# EAGLE board wear_fixture_board_mill_single_layer (EAGLE 9.1.3)
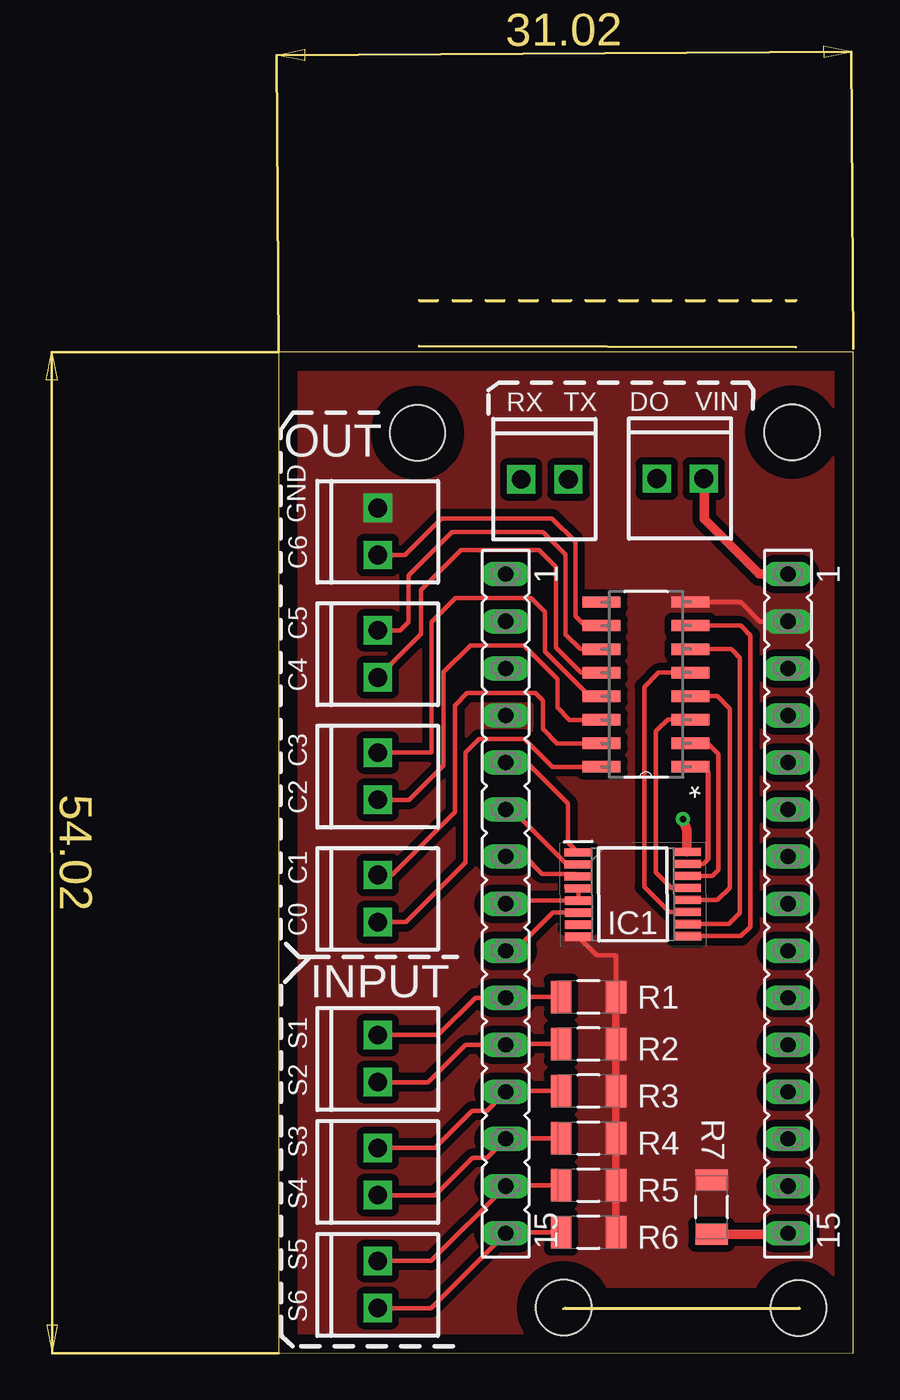
[diagram p0: board, top side]
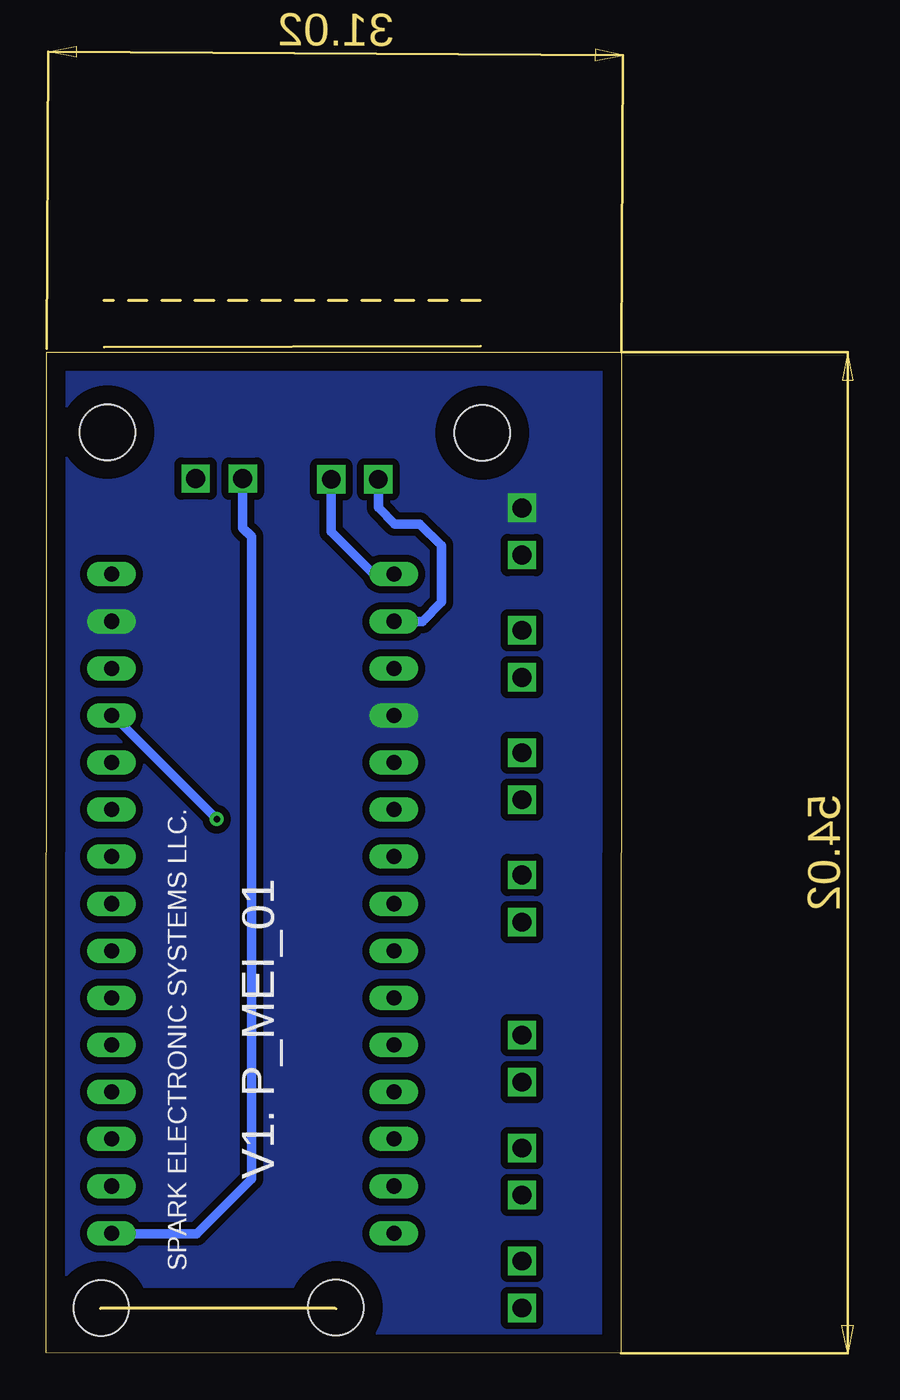
[diagram p1: board, bottom side, seen from below]

Size 31.03 x 56.81 mm. Coordinates in mm from the lower left corner, seen from the top.
Outline: 15.47,2.43 28.1,2.43 28.12,2.4
Outline: 7.6,56.81 27.93,56.81
Outline: 0.01,0 31.03,0.01 31.02,54.03 0,54.02 0.01,0
Copper layers (1*16): Top 0.035mm / dielectric 1.5mm / Bottom 0.035mm
Design rules "default": minimum track width 6mil, minimum drill 0.35mm, track to track 6mil, track to pad 6mil, pad to pad 6mil, via to via 6mil, smd to smd 6mil, copper to edge 40mil, drill to drill 6mil, minimum pad ring 10mil, minimum via ring 8mil, stop-mask expansion 4mil, vias tented up to drill 0mil, thermal gap 10mil
Holes 3 mm at 7.51,49.67 27.73,49.7 15.39,2.45 28.07,2.43

## Footprints (pad centres in the part's own frame; a part is rotated, then mirrored left to right if it is on the bottom)
SOP65P640X120-16N = smd 1.475 x 0.45: 1 -2.938,2.275; 2 -2.938,1.625; 3 -2.938,0.975; 4 -2.938,0.325; 5 -2.938,-0.325; 6 -2.938,-0.975; 7 -2.938,-1.625; 8 -2.938,-2.275; 9 2.938,-2.275; 10 2.938,-1.625; 11 2.938,-0.975; 12 2.938,-0.325; 13 2.938,0.325; 14 2.938,0.975; 15 2.938,1.625; 16 2.938,2.275
1X02_2.54_SCREWTERM = drill 1.016 square: P1 2.54,0; P2 0,0
RESC3216X71N = smd 1.118 x 1.753: 1 -1.473,0; 2 1.473,0
FE15 = drill 0.813 long: 1 -17.78,0; 2 -15.24,0; 3 -12.7,0; 4 -10.16,0; 5 -7.62,0; 6 -5.08,0; 7 -2.54,0; 8 0,0; 9 2.54,0; 10 5.08,0; 11 7.62,0; 12 10.16,0; 13 12.7,0; 14 15.24,0; 15 17.78,0
SOIC127P600X175-16N = smd 2.057 x 0.61: 1 -4.801,8.89; 2 -4.801,7.62; 3 -4.801,6.35; 4 -4.801,5.08; 5 -4.801,3.81; 6 -4.801,2.54; 7 -4.801,1.27; 8 -4.801,0; 9 0,0; 10 0,1.27; 11 0,2.54; 12 0,3.81; 13 0,5.08; 14 0,6.35; 15 0,7.62; 16 0,8.89

## Placement (x,y rotation side)
IC1  74VHC238FT  [SOP65P640X120-16N]  19.13,24.76 0.3 top
J1  [1X02_2.54_SCREWTERM]  5.36,14.62 90 top
J2  [1X02_2.54_SCREWTERM]  5.36,8.53 90 top
J3  [1X02_2.54_SCREWTERM]  5.36,2.43 90 top
J4  [1X02_2.54_SCREWTERM]  5.36,23.26 90 top
J5  [1X02_2.54_SCREWTERM]  5.36,29.86 90 top
J6  [1X02_2.54_SCREWTERM]  5.36,36.47 90 top
J7  [1X02_2.54_SCREWTERM]  20.43,47.2 0 top
J8  [1X02_2.54_SCREWTERM]  5.36,43.07 90 top
J9  [1X02_2.54_SCREWTERM]  13.11,47.16 0 top
R1  [RESC3216X71N]  16.74,19.22 0 top
R2  [RESC3216X71N]  16.74,16.68 0 top
R3  [RESC3216X71N]  16.74,14.14 0 top
R4  [RESC3216X71N]  16.74,11.6 0 top
R5  [RESC3216X71N]  16.74,9.06 0 top
R6  [RESC3216X71N]  16.74,6.52 0 top
R7  [RESC3216X71N]  23.38,7.88 270 top
SV1  [FE15]  27.51,24.25 270 top
SV2  [FE15]  12.27,24.25 270 top
U1  ULN2003ADR  [SOIC127P600X175-16N]  17.45,40.53 180 top

## Library data of the parts
IC1 = SamacSys_Parts; DESCRIPTION: Encoders, Decoders, Multiplexers & Demultiplexers CMOS Logic IC 5.5ns 8mA 2.0V-5.5V; HEIGHT: 1.2mm; MANUFACTURER_NAME: Toshiba; MANUFACTURER_PART_NUMBER: 74VHC238FT; MOUSER_PART_NUMBER: 757-74VHC238FT; MOUSER_PRICE-STOCK: https://www.mouser.co.uk/ProductDetail/Toshiba/74VHC238FT?qs=byeeYqUIh0Pl5hUxTthlPw%3D%3D
J1-J9 = SparkFun-Connectors
R1-R7 = Vishay_By_element14_Batch_1; MPN: CRCW12061K00FKEA; OC_FARNELL: 1469965; OC_NEWARK: 53K1780; SUPPLIER: Vishay; TOLERANCE: ±1%; WATTAGE: 0.25W
SV1 SV2 = con-lsta; OC_FARNELL: unknown; OC_NEWARK: unknown
U1 = Texas Instruments_By_element14_Batch_1; MPN: ULN2003ADR; OC_FARNELL: 1470513; OC_NEWARK: 77C3560; PACKAGE: SOIC-16; SUPPLIER: TEXAS INSTRUMENTS

## Nets
DEWE_: J7.P2 R7.2 SV1.15
EN: IC1.4 IC1.5 SV2.8
GND: IC1.8 J8.P1 R1.2 R2.2 R3.2 R4.2 R5.2 R6.2 R7.1 SV1.2 SV2.4 U1.8
IN_0: IC1.6 SV2.9
OUT1: J4.P2 U1.16
OUT2: J4.P1 U1.15
OUT3: J5.P2 U1.14
OUT4: J5.P1 U1.13
OUT5: J6.P2 U1.12
OUT6: J6.P1 U1.11
OUT7: J8.P2 U1.10
RX: J9.P2 SV2.2
SEL_A: IC1.1 SV2.5
SEL_B: IC1.2 SV2.6
SEL_C: IC1.3 SV2.7
SNS1: J1.P1 R1.1 SV2.10
SNS2: J1.P2 R2.1 SV2.11
SNS3: J2.P1 R3.1 SV2.12
SNS4: J2.P2 R4.1 SV2.13
SNS5: J3.P1 R5.1 SV2.14
SNS6: J3.P2 R6.1 SV2.15
TX: J9.P1 SV2.1
VCC: IC1.16 SV1.4
VIN: J7.P1 SV1.1
Y0: IC1.15 U1.1
Y1: IC1.14 U1.2
Y2: IC1.13 U1.3
Y3: IC1.12 U1.4
Y4: IC1.11 U1.5
Y5: IC1.10 U1.6
Y6: IC1.9 U1.7

## Tracks (layer width: path | path; a pad name or v marks a point on that pad's centre or on a via)
DEWE_
  Top 0.508: R7.2 27.45,6.41 SV1.15
  Bottom 0.508: SV1.15 26.32,6.47 26.29,6.44 22.92,6.44 19.95,9.41 19.95,44.06 20.43,44.54 J7.P2
EN
  Top 0.254: SV2.8 12.44,24.42 IC1.5 IC1.4
GND
  Top 0.152: 21.74,40.53 U1.8
  Top 0.254: IC1.8 17.2,21.48 18.22,21.48 R1.2 | SV1.2 26,39.49 24.96,40.53 U1.8
  Top 0.406: R6.2 R5.2 R4.2 R3.2 R2.2 R1.2 18.52,19.22
  pour Top (isolate 0.381, no thermals): 0.01,53.98 30.7,53.98 30.7,0 0.01,0
  pour Bottom (isolate 0.381, no thermals): 0.01,54.07 31.04,54.07 31.04,-0.22 0.01,-0.22
IN_0
  Top 0.254: IC1.6 14.81,23.77 12.75,21.71 SV2.9
OUT1
  Top 0.254: U1.16 14.79,31.64 13.29,33.14 10.84,33.14 10.1,32.41 10.1,26.48 6.89,23.26 J4.P2
OUT2
  Top 0.254: J4.P1 6.13,25.8 9.53,29.2 9.53,34.96 10.19,35.62 13.88,35.62 14.28,35.22 14.28,33.68 15.05,32.91 U1.15
OUT3
  Top 0.254: U1.14 15.72,34.18 15.06,34.84 15.06,36.38 13.26,38.19 10.36,38.19 8.91,36.74 8.91,31.72 7.05,29.86 J5.P2
OUT4
  Top 0.152: U1.13 17.42,35.48
  Top 0.254: J5.P1 8.23,32.4 8.27,32.44 8.27,39.45 9.56,40.74 13.64,40.74 14.38,40 14.38,37.85 16.79,35.45 U1.13
OUT5
  Top 0.254: U1.12 16.34,36.72 14.98,38.08 14.98,42.42 14.06,43.34 9.86,43.34 7.7,41.18 7.7,38.81 J6.P2
OUT6
  Top 0.254: U1.11 16.31,37.99 15.5,38.79 15.5,43.1 14.29,44.32 9.38,44.32 7.03,41.97 7.03,39.46 6.58,39.01 J6.P1
OUT7
  Top 0.254: U1.10 16.56,39.26 16.03,39.79 16.03,43.79 14.77,45.04 8.79,45.04 6.82,43.07 J8.P2
RX
  Bottom 0.508: SV2.2 10.73,39.49 9.7,40.52 9.7,43.57 10.88,44.75 12.23,44.75 13.11,45.63 J9.P2
SEL_A
  Top 0.254: IC1.1 15.64,27.56 15.64,29.66 13.43,31.87 SV2.5
SEL_B
  Top 0.254: IC1.2 15.57,26.37 12.61,29.33 SV2.6
SEL_C
  Top 0.254: SV2.7 13.31,26.79 14.24,25.86 16.05,25.86 IC1.3
SNS1
  Top 0.152: 15.37,19.17 R1.1
  Top 0.254: R1.1 12.32,19.22 SV2.10 10.63,19.17 8.62,17.16 J1.P1
SNS2
  Top 0.152: R2.1 15.53,16.94
  Top 0.254: R2.1 12.32,16.68 SV2.11 10.1,16.63 8.09,14.62 J1.P2
SNS3
  Top 0.254: R3.1 12.32,14.14 SV2.12 11.26,13.08 10.46,13.08 8.45,11.07 J2.P1
SNS4
  Top 0.152: 15.37,11.55 R4.1 | 12.32,11.6 SV2.13
  Top 0.254: R4.1 12.32,11.6 | SV2.13 11.26,10.54 10.47,10.54 8.46,8.53 J2.P2
SNS5
  Top 0.152: 15.37,8.96 R5.1
  Top 0.254: R5.1 12.32,9.06 SV2.14 8.23,4.97 J3.P1
SNS6
  Top 0.152: 14.76,6.52 R6.1
  Top 0.254: R6.1 12.32,6.52 SV2.15 8.23,2.43 J3.P2
TX
  Bottom 0.508: J9.P1 15.66,47.15 15.66,44.33 13.36,42.03 SV2.1
VCC  (via drill 0.35)
  Top 0.508: IC1.16 22.06,28.21 v21.84,28.82
  Bottom 0.508: SV1.4 27.43,34.41 v21.84,28.82
VIN
  Top 0.508: SV1.1 25.97,42.03 22.99,45.01 22.99,47.18 J7.P1
Y0
  Top 0.152: 22.94,31.62 23.14,31.42 23.14,27.05
  Top 0.254: IC1.15 22.93,26.4 23.2,26.67 23.2,31.36 22.94,31.62 22.92,31.64 U1.1
Y1
  Top 0.152: 22.18,25.75 IC1.14
  Top 0.254: U1.2 23.17,32.91 23.75,32.33 23.75,26.08 23.43,25.75 22.18,25.75
Y2
  Top 0.254: IC1.13 21.22,25.1 20.38,25.94 20.38,33.57 21.02,34.2 22.23,34.2 U1.3
Y3
  Top 0.254: U1.4 23.68,35.45 24.37,34.77 24.37,25.11 23.7,24.45 IC1.12
Y4
  Top 0.254: U1.5 20.52,36.72 19.75,35.95 19.75,25.16 21.11,23.8 IC1.11
Y5
  Top 0.152: 22.18,23.15 IC1.10
  Top 0.254: U1.6 24.44,37.99 24.92,37.51 24.92,23.75 24.33,23.15 22.18,23.15
Y6
  Top 0.254: IC1.9 24.97,22.5 25.48,23.01 25.48,38.73 24.95,39.26 U1.7

## Text on the board
tPlace: RX | TX | DO | VIN | OUT | GND | C6 | C5 | C4 | C3 | C2 | C1 | C0 | INPUT | S1 | S2 | S3 | S4 | S5 | S6
bPlace: SPARK ELECTRONIC SYSTEMS LLC. | V1. P_MEI_01